# EAGLE board soic16 (EAGLE 5.06)
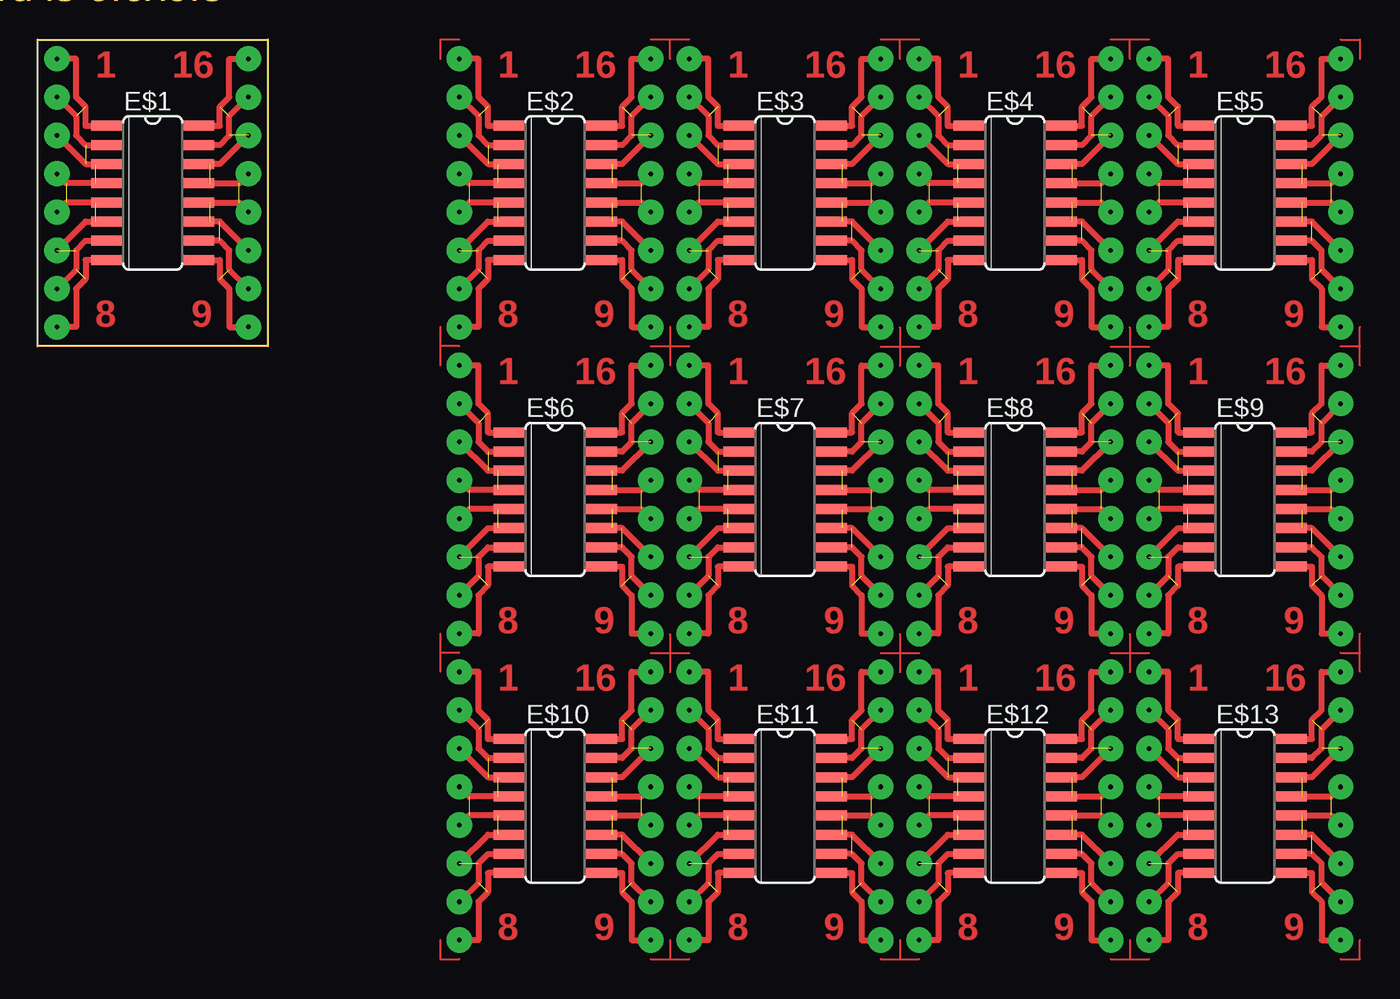
[diagram p0: board, top side]

Size 15.24 x 20.32 mm. Coordinates in mm from the lower left corner, seen from the top.
Outline: 15.24,20.32 15.24,0 0,0 0,20.32 15.24,20.32
Copper layers (1*16): Top 0.035mm / dielectric 1.5mm / Bottom 0.035mm
Design rules "default": minimum track width 10mil, minimum drill 24mil, track to track 8mil, track to pad 8mil, pad to pad 8mil, via to via 8mil, smd to smd 8mil, copper to edge 40mil, drill to drill 8mil, minimum pad ring 10mil, minimum via ring 8mil, stop-mask expansion 4mil, vias tented up to drill 0mil, thermal gap 10mil

## Footprints (pad centres in the part's own frame; a part is rotated, then mirrored left to right if it is on the bottom)
SO16 = smd 0.66 x 2.032: 1 -4.445,-3.073; 2 -3.175,-3.073; 3 -1.905,-3.073; 4 -0.635,-3.073; 5 0.635,-3.073; 6 1.905,-3.073; 7 3.175,-3.073; 8 4.445,-3.073; 9 4.445,3.073; 10 3.175,3.073; 11 1.905,3.073; 12 0.635,3.073; 13 -0.635,3.073; 14 -1.905,3.073; 15 -3.175,3.073; 16 -4.445,3.073

## Placement (x,y rotation side)
E$1  [SO16]  7.62,10.16 270 top
E$2  [SO16]  34.29,10.16 270 top  (outside the outline)
E$3  [SO16]  49.53,10.16 270 top  (outside the outline)
E$4  [SO16]  64.77,10.16 270 top  (outside the outline)
E$5  [SO16]  80.01,10.16 270 top  (outside the outline)
E$6  [SO16]  34.29,-10.16 270 top  (outside the outline)
E$7  [SO16]  49.53,-10.16 270 top  (outside the outline)
E$8  [SO16]  64.77,-10.16 270 top  (outside the outline)
E$9  [SO16]  80.01,-10.16 270 top  (outside the outline)
E$10  [SO16]  34.29,-30.48 270 top  (outside the outline)
E$11  [SO16]  49.53,-30.48 270 top  (outside the outline)
E$12  [SO16]  64.77,-30.48 270 top  (outside the outline)
E$13  [SO16]  80.01,-30.48 270 top  (outside the outline)

## Library data of the parts
E$1-E$13 = 45xx

## Tracks (layer width: path | path; a pad name or v marks a point on that pad's centre or on a via)
S$1  (via drill 0.3 pad 1.68)  (7 unrouted)
  Top 0.406: 38.1,10.79 40,10.79 v40.64,11.43 | 38.1,9.53 40,9.53 v40.64,8.89 | v40.64,13.97 38.73,12.06 38.1,12.06 | v40.64,6.35 38.73,8.26 38.1,8.26 | v40.64,16.51 39.37,15.24 39.37,13.97 38.73,13.34 38.1,13.34 | v40.64,19.05 39.37,19.05 39.37,16.51 38.73,15.88 38.73,14.61 38.1,14.61 | v40.64,3.81 39.37,5.08 39.37,6.35 38.73,6.99 38.1,6.99 | v40.64,1.27 39.37,1.27 39.37,3.81 38.73,4.45 38.73,5.71 38.1,5.71
S$2  (via drill 0.3 pad 1.68)  (7 unrouted)
  Top 0.406: 11.43,10.79 13.34,10.79 v13.97,11.43 | 11.43,9.53 13.34,9.53 v13.97,8.89 | v13.97,13.97 12.07,12.06 11.43,12.06 | v13.97,6.35 12.07,8.26 11.43,8.26 | v13.97,16.51 12.7,15.24 12.7,13.97 12.07,13.34 11.43,13.34 | v13.97,19.05 12.7,19.05 12.7,16.51 12.07,15.88 12.07,14.61 11.43,14.61 | v13.97,3.81 12.7,5.08 12.7,6.35 12.07,6.99 11.43,6.99 | v13.97,1.27 12.7,1.27 12.7,3.81 12.07,4.45 12.07,5.71 11.43,5.71
S$3  (via drill 0.3 pad 1.68)  (7 unrouted)
  Top 0.406: 30.48,8.26 29.85,8.26 v27.94,6.35 | 30.48,9.53 28.57,9.53 v27.94,8.89 | 30.48,12.06 29.85,12.06 v27.94,13.97 | 30.48,10.79 28.57,10.79 v27.94,11.43 | v27.94,16.51 29.21,15.24 29.21,13.97 29.85,13.34 30.48,13.34 | v27.94,19.05 29.21,19.05 29.21,16.51 29.85,15.88 29.85,14.61 30.48,14.61 | v27.94,3.81 29.21,5.08 29.21,6.35 29.85,6.99 30.48,6.99 | v27.94,1.27 29.21,1.27 29.21,3.81 29.85,4.45 29.85,5.71 30.48,5.71
S$4  (via drill 0.3 pad 1.68)  (7 unrouted)
  Top 0.406: 3.81,8.26 3.17,8.26 v1.27,6.35 | 3.81,9.53 1.91,9.53 v1.27,8.89 | 3.81,12.06 3.17,12.06 v1.27,13.97 | 3.81,10.79 1.91,10.79 v1.27,11.43 | v1.27,16.51 2.54,15.24 2.54,13.97 3.17,13.34 3.81,13.34 | v1.27,19.05 2.54,19.05 2.54,16.51 3.17,15.88 3.17,14.61 3.81,14.61 | v1.27,3.81 2.54,5.08 2.54,6.35 3.17,6.99 3.81,6.99 | v1.27,1.27 2.54,1.27 2.54,3.81 3.17,4.45 3.17,5.71 3.81,5.71
S$5  (via drill 0.3 pad 1.68)  (7 unrouted)
  Top 0.406: 53.34,10.79 55.24,10.79 v55.88,11.43 | 53.34,9.53 55.24,9.53 v55.88,8.89 | v55.88,13.97 53.97,12.06 53.34,12.06 | v55.88,6.35 53.97,8.26 53.34,8.26 | v55.88,16.51 54.61,15.24 54.61,13.97 53.97,13.34 53.34,13.34 | v55.88,19.05 54.61,19.05 54.61,16.51 53.97,15.88 53.97,14.61 53.34,14.61 | v55.88,3.81 54.61,5.08 54.61,6.35 53.97,6.99 53.34,6.99 | v55.88,1.27 54.61,1.27 54.61,3.81 53.97,4.45 53.97,5.71 53.34,5.71
S$6  (via drill 0.3 pad 1.68)  (7 unrouted)
  Top 0.406: 45.72,8.26 45.09,8.26 v43.18,6.35 | 45.72,9.53 43.81,9.53 v43.18,8.89 | 45.72,12.06 45.09,12.06 v43.18,13.97 | 45.72,10.79 43.81,10.79 v43.18,11.43 | v43.18,16.51 44.45,15.24 44.45,13.97 45.09,13.34 45.72,13.34 | v43.18,19.05 44.45,19.05 44.45,16.51 45.09,15.88 45.09,14.61 45.72,14.61 | v43.18,3.81 44.45,5.08 44.45,6.35 45.09,6.99 45.72,6.99 | v43.18,1.27 44.45,1.27 44.45,3.81 45.09,4.45 45.09,5.71 45.72,5.71
S$7  (via drill 0.3 pad 1.68)  (7 unrouted)
  Top 0.406: 68.58,10.79 70.48,10.79 v71.12,11.43 | 68.58,9.53 70.48,9.53 v71.12,8.89 | v71.12,13.97 69.22,12.06 68.58,12.06 | v71.12,6.35 69.22,8.26 68.58,8.26 | v71.12,16.51 69.85,15.24 69.85,13.97 69.22,13.34 68.58,13.34 | v71.12,19.05 69.85,19.05 69.85,16.51 69.22,15.88 69.22,14.61 68.58,14.61 | v71.12,3.81 69.85,5.08 69.85,6.35 69.22,6.99 68.58,6.99 | v71.12,1.27 69.85,1.27 69.85,3.81 69.22,4.45 69.22,5.71 68.58,5.71
S$8  (via drill 0.3 pad 1.68)  (7 unrouted)
  Top 0.406: 60.96,8.26 60.32,8.26 v58.42,6.35 | 60.96,9.53 59.05,9.53 v58.42,8.89 | 60.96,12.06 60.32,12.06 v58.42,13.97 | 60.96,10.79 59.05,10.79 v58.42,11.43 | v58.42,16.51 59.69,15.24 59.69,13.97 60.32,13.34 60.96,13.34 | v58.42,19.05 59.69,19.05 59.69,16.51 60.32,15.88 60.32,14.61 60.96,14.61 | v58.42,3.81 59.69,5.08 59.69,6.35 60.32,6.99 60.96,6.99 | v58.42,1.27 59.69,1.27 59.69,3.81 60.32,4.45 60.32,5.71 60.96,5.71
S$9  (via drill 0.3 pad 1.68)  (7 unrouted)
  Top 0.406: 83.82,10.79 85.73,10.79 v86.36,11.43 | 83.82,9.53 85.73,9.53 v86.36,8.89 | v86.36,13.97 84.45,12.06 83.82,12.06 | v86.36,6.35 84.45,8.26 83.82,8.26 | v86.36,16.51 85.09,15.24 85.09,13.97 84.45,13.34 83.82,13.34 | v86.36,19.05 85.09,19.05 85.09,16.51 84.45,15.88 84.45,14.61 83.82,14.61 | v86.36,3.81 85.09,5.08 85.09,6.35 84.45,6.99 83.82,6.99 | v86.36,1.27 85.09,1.27 85.09,3.81 84.45,4.45 84.45,5.71 83.82,5.71
S$10  (via drill 0.3 pad 1.68)  (7 unrouted)
  Top 0.406: 76.2,8.26 75.56,8.26 v73.66,6.35 | 76.2,9.53 74.3,9.53 v73.66,8.89 | 76.2,12.06 75.56,12.06 v73.66,13.97 | 76.2,10.79 74.3,10.79 v73.66,11.43 | v73.66,16.51 74.93,15.24 74.93,13.97 75.56,13.34 76.2,13.34 | v73.66,19.05 74.93,19.05 74.93,16.51 75.56,15.88 75.56,14.61 76.2,14.61 | v73.66,3.81 74.93,5.08 74.93,6.35 75.56,6.99 76.2,6.99 | v73.66,1.27 74.93,1.27 74.93,3.81 75.56,4.45 75.56,5.71 76.2,5.71
S$11  (via drill 0.3 pad 1.68)  (7 unrouted)
  Top 0.406: 38.1,-9.52 40,-9.52 v40.64,-8.89 | 38.1,-10.79 40,-10.79 v40.64,-11.43 | v40.64,-6.35 38.73,-8.25 38.1,-8.25 | v40.64,-13.97 38.73,-12.07 38.1,-12.07 | v40.64,-3.81 39.37,-5.08 39.37,-6.35 38.73,-6.98 38.1,-6.98 | v40.64,-1.27 39.37,-1.27 39.37,-3.81 38.73,-4.45 38.73,-5.71 38.1,-5.71 | v40.64,-16.51 39.37,-15.24 39.37,-13.97 38.73,-13.34 38.1,-13.34 | v40.64,-19.05 39.37,-19.05 39.37,-16.51 38.73,-15.88 38.73,-14.61 38.1,-14.61
S$12  (via drill 0.3 pad 1.68)  (7 unrouted)
  Top 0.406: 30.48,-12.07 29.85,-12.07 v27.94,-13.97 | 30.48,-10.79 28.57,-10.79 v27.94,-11.43 | 30.48,-8.25 29.85,-8.25 v27.94,-6.35 | 30.48,-9.52 28.57,-9.52 v27.94,-8.89 | v27.94,-3.81 29.21,-5.08 29.21,-6.35 29.85,-6.98 30.48,-6.98 | v27.94,-1.27 29.21,-1.27 29.21,-3.81 29.85,-4.45 29.85,-5.71 30.48,-5.71 | v27.94,-16.51 29.21,-15.24 29.21,-13.97 29.85,-13.34 30.48,-13.34 | v27.94,-19.05 29.21,-19.05 29.21,-16.51 29.85,-15.88 29.85,-14.61 30.48,-14.61
S$13  (via drill 0.3 pad 1.68)  (7 unrouted)
  Top 0.406: 53.34,-9.52 55.24,-9.52 v55.88,-8.89 | 53.34,-10.79 55.24,-10.79 v55.88,-11.43 | v55.88,-6.35 53.97,-8.25 53.34,-8.25 | v55.88,-13.97 53.97,-12.07 53.34,-12.07 | v55.88,-3.81 54.61,-5.08 54.61,-6.35 53.97,-6.98 53.34,-6.98 | v55.88,-1.27 54.61,-1.27 54.61,-3.81 53.97,-4.45 53.97,-5.71 53.34,-5.71 | v55.88,-16.51 54.61,-15.24 54.61,-13.97 53.97,-13.34 53.34,-13.34 | v55.88,-19.05 54.61,-19.05 54.61,-16.51 53.97,-15.88 53.97,-14.61 53.34,-14.61
S$14  (via drill 0.3 pad 1.68)  (7 unrouted)
  Top 0.406: 45.72,-12.07 45.09,-12.07 v43.18,-13.97 | 45.72,-10.79 43.81,-10.79 v43.18,-11.43 | 45.72,-8.25 45.09,-8.25 v43.18,-6.35 | 45.72,-9.52 43.81,-9.52 v43.18,-8.89 | v43.18,-3.81 44.45,-5.08 44.45,-6.35 45.09,-6.98 45.72,-6.98 | v43.18,-1.27 44.45,-1.27 44.45,-3.81 45.09,-4.45 45.09,-5.71 45.72,-5.71 | v43.18,-16.51 44.45,-15.24 44.45,-13.97 45.09,-13.34 45.72,-13.34 | v43.18,-19.05 44.45,-19.05 44.45,-16.51 45.09,-15.88 45.09,-14.61 45.72,-14.61
S$15  (via drill 0.3 pad 1.68)  (7 unrouted)
  Top 0.406: 68.58,-9.52 70.48,-9.52 v71.12,-8.89 | 68.58,-10.79 70.48,-10.79 v71.12,-11.43 | v71.12,-6.35 69.22,-8.25 68.58,-8.25 | v71.12,-13.97 69.22,-12.07 68.58,-12.07 | v71.12,-3.81 69.85,-5.08 69.85,-6.35 69.22,-6.98 68.58,-6.98 | v71.12,-1.27 69.85,-1.27 69.85,-3.81 69.22,-4.45 69.22,-5.71 68.58,-5.71 | v71.12,-16.51 69.85,-15.24 69.85,-13.97 69.22,-13.34 68.58,-13.34 | v71.12,-19.05 69.85,-19.05 69.85,-16.51 69.22,-15.88 69.22,-14.61 68.58,-14.61
S$16  (via drill 0.3 pad 1.68)  (7 unrouted)
  Top 0.406: 60.96,-12.07 60.32,-12.07 v58.42,-13.97 | 60.96,-10.79 59.05,-10.79 v58.42,-11.43 | 60.96,-8.25 60.32,-8.25 v58.42,-6.35 | 60.96,-9.52 59.05,-9.52 v58.42,-8.89 | v58.42,-3.81 59.69,-5.08 59.69,-6.35 60.32,-6.98 60.96,-6.98 | v58.42,-1.27 59.69,-1.27 59.69,-3.81 60.32,-4.45 60.32,-5.71 60.96,-5.71 | v58.42,-16.51 59.69,-15.24 59.69,-13.97 60.32,-13.34 60.96,-13.34 | v58.42,-19.05 59.69,-19.05 59.69,-16.51 60.32,-15.88 60.32,-14.61 60.96,-14.61
S$17  (via drill 0.3 pad 1.68)  (7 unrouted)
  Top 0.406: 83.82,-9.52 85.73,-9.52 v86.36,-8.89 | 83.82,-10.79 85.73,-10.79 v86.36,-11.43 | v86.36,-6.35 84.45,-8.25 83.82,-8.25 | v86.36,-13.97 84.45,-12.07 83.82,-12.07 | v86.36,-3.81 85.09,-5.08 85.09,-6.35 84.45,-6.98 83.82,-6.98 | v86.36,-1.27 85.09,-1.27 85.09,-3.81 84.45,-4.45 84.45,-5.71 83.82,-5.71 | v86.36,-16.51 85.09,-15.24 85.09,-13.97 84.45,-13.34 83.82,-13.34 | v86.36,-19.05 85.09,-19.05 85.09,-16.51 84.45,-15.88 84.45,-14.61 83.82,-14.61
S$18  (via drill 0.3 pad 1.68)  (7 unrouted)
  Top 0.406: 76.2,-12.07 75.56,-12.07 v73.66,-13.97 | 76.2,-10.79 74.3,-10.79 v73.66,-11.43 | 76.2,-8.25 75.56,-8.25 v73.66,-6.35 | 76.2,-9.52 74.3,-9.52 v73.66,-8.89 | v73.66,-3.81 74.93,-5.08 74.93,-6.35 75.56,-6.98 76.2,-6.98 | v73.66,-1.27 74.93,-1.27 74.93,-3.81 75.56,-4.45 75.56,-5.71 76.2,-5.71 | v73.66,-16.51 74.93,-15.24 74.93,-13.97 75.56,-13.34 76.2,-13.34 | v73.66,-19.05 74.93,-19.05 74.93,-16.51 75.56,-15.88 75.56,-14.61 76.2,-14.61
S$19  (via drill 0.3 pad 1.68)  (7 unrouted)
  Top 0.406: 38.1,-29.85 40,-29.85 v40.64,-29.21 | 38.1,-31.11 40,-31.11 v40.64,-31.75 | v40.64,-26.67 38.73,-28.57 38.1,-28.57 | v40.64,-34.29 38.73,-32.39 38.1,-32.39 | v40.64,-24.13 39.37,-25.4 39.37,-26.67 38.73,-27.31 38.1,-27.31 | v40.64,-21.59 39.37,-21.59 39.37,-24.13 38.73,-24.76 38.73,-26.04 38.1,-26.04 | v40.64,-36.83 39.37,-35.56 39.37,-34.29 38.73,-33.66 38.1,-33.66 | v40.64,-39.37 39.37,-39.37 39.37,-36.83 38.73,-36.19 38.73,-34.92 38.1,-34.92
S$20  (via drill 0.3 pad 1.68)  (7 unrouted)
  Top 0.406: 30.48,-32.39 29.85,-32.39 v27.94,-34.29 | 30.48,-31.11 28.57,-31.11 v27.94,-31.75 | 30.48,-28.57 29.85,-28.57 v27.94,-26.67 | 30.48,-29.85 28.57,-29.85 v27.94,-29.21 | v27.94,-24.13 29.21,-25.4 29.21,-26.67 29.85,-27.31 30.48,-27.31 | v27.94,-21.59 29.21,-21.59 29.21,-24.13 29.85,-24.76 29.85,-26.04 30.48,-26.04 | v27.94,-36.83 29.21,-35.56 29.21,-34.29 29.85,-33.66 30.48,-33.66 | v27.94,-39.37 29.21,-39.37 29.21,-36.83 29.85,-36.19 29.85,-34.92 30.48,-34.92
S$21  (via drill 0.3 pad 1.68)  (7 unrouted)
  Top 0.406: 53.34,-29.85 55.24,-29.85 v55.88,-29.21 | 53.34,-31.11 55.24,-31.11 v55.88,-31.75 | v55.88,-26.67 53.97,-28.57 53.34,-28.57 | v55.88,-34.29 53.97,-32.39 53.34,-32.39 | v55.88,-24.13 54.61,-25.4 54.61,-26.67 53.97,-27.31 53.34,-27.31 | v55.88,-21.59 54.61,-21.59 54.61,-24.13 53.97,-24.76 53.97,-26.04 53.34,-26.04 | v55.88,-36.83 54.61,-35.56 54.61,-34.29 53.97,-33.66 53.34,-33.66 | v55.88,-39.37 54.61,-39.37 54.61,-36.83 53.97,-36.19 53.97,-34.92 53.34,-34.92
S$22  (via drill 0.3 pad 1.68)  (7 unrouted)
  Top 0.406: 45.72,-32.39 45.09,-32.39 v43.18,-34.29 | 45.72,-31.11 43.81,-31.11 v43.18,-31.75 | 45.72,-28.57 45.09,-28.57 v43.18,-26.67 | 45.72,-29.85 43.81,-29.85 v43.18,-29.21 | v43.18,-24.13 44.45,-25.4 44.45,-26.67 45.09,-27.31 45.72,-27.31 | v43.18,-21.59 44.45,-21.59 44.45,-24.13 45.09,-24.76 45.09,-26.04 45.72,-26.04 | v43.18,-36.83 44.45,-35.56 44.45,-34.29 45.09,-33.66 45.72,-33.66 | v43.18,-39.37 44.45,-39.37 44.45,-36.83 45.09,-36.19 45.09,-34.92 45.72,-34.92
S$23  (via drill 0.3 pad 1.68)  (7 unrouted)
  Top 0.406: 68.58,-29.85 70.48,-29.85 v71.12,-29.21 | 68.58,-31.11 70.48,-31.11 v71.12,-31.75 | v71.12,-26.67 69.22,-28.57 68.58,-28.57 | v71.12,-34.29 69.22,-32.39 68.58,-32.39 | v71.12,-24.13 69.85,-25.4 69.85,-26.67 69.22,-27.31 68.58,-27.31 | v71.12,-21.59 69.85,-21.59 69.85,-24.13 69.22,-24.76 69.22,-26.04 68.58,-26.04 | v71.12,-36.83 69.85,-35.56 69.85,-34.29 69.22,-33.66 68.58,-33.66 | v71.12,-39.37 69.85,-39.37 69.85,-36.83 69.22,-36.19 69.22,-34.92 68.58,-34.92
S$24  (via drill 0.3 pad 1.68)  (7 unrouted)
  Top 0.406: 60.96,-32.39 60.32,-32.39 v58.42,-34.29 | 60.96,-31.11 59.05,-31.11 v58.42,-31.75 | 60.96,-28.57 60.32,-28.57 v58.42,-26.67 | 60.96,-29.85 59.05,-29.85 v58.42,-29.21 | v58.42,-24.13 59.69,-25.4 59.69,-26.67 60.32,-27.31 60.96,-27.31 | v58.42,-21.59 59.69,-21.59 59.69,-24.13 60.32,-24.76 60.32,-26.04 60.96,-26.04 | v58.42,-36.83 59.69,-35.56 59.69,-34.29 60.32,-33.66 60.96,-33.66 | v58.42,-39.37 59.69,-39.37 59.69,-36.83 60.32,-36.19 60.32,-34.92 60.96,-34.92
S$25  (via drill 0.3 pad 1.68)  (7 unrouted)
  Top 0.406: 83.82,-29.85 85.73,-29.85 v86.36,-29.21 | 83.82,-31.11 85.73,-31.11 v86.36,-31.75 | v86.36,-26.67 84.45,-28.57 83.82,-28.57 | v86.36,-34.29 84.45,-32.39 83.82,-32.39 | v86.36,-24.13 85.09,-25.4 85.09,-26.67 84.45,-27.31 83.82,-27.31 | v86.36,-21.59 85.09,-21.59 85.09,-24.13 84.45,-24.76 84.45,-26.04 83.82,-26.04 | v86.36,-36.83 85.09,-35.56 85.09,-34.29 84.45,-33.66 83.82,-33.66 | v86.36,-39.37 85.09,-39.37 85.09,-36.83 84.45,-36.19 84.45,-34.92 83.82,-34.92
S$26  (via drill 0.3 pad 1.68)  (7 unrouted)
  Top 0.406: 76.2,-32.39 75.56,-32.39 v73.66,-34.29 | 76.2,-31.11 74.3,-31.11 v73.66,-31.75 | 76.2,-28.57 75.56,-28.57 v73.66,-26.67 | 76.2,-29.85 74.3,-29.85 v73.66,-29.21 | v73.66,-24.13 74.93,-25.4 74.93,-26.67 75.56,-27.31 76.2,-27.31 | v73.66,-21.59 74.93,-21.59 74.93,-24.13 75.56,-24.76 75.56,-26.04 76.2,-26.04 | v73.66,-36.83 74.93,-35.56 74.93,-34.29 75.56,-33.66 76.2,-33.66 | v73.66,-39.37 74.93,-39.37 74.93,-36.83 75.56,-36.19 75.56,-34.92 76.2,-34.92
S$27
  Top 0.127: 27.94,20.32 26.67,20.32 26.67,19.05
S$28
  Top 0.127: 86.36,20.32 87.63,20.32 87.63,19.05
S$29
  Top 0.127: 87.63,-39.37 87.63,-40.64 86.36,-40.64
S$30
  Top 0.127: 26.67,-39.37 26.67,-40.64 27.94,-40.64
S$31
  Top 0.127: 40.64,-40.64 41.91,-40.64 | 41.91,-40.64 43.18,-40.64 | 41.91,-39.37 41.91,-40.64
S$32
  Top 0.127: 55.88,-40.64 57.15,-40.64 | 57.15,-40.64 58.42,-40.64 | 57.15,-39.37 57.15,-40.64
S$33
  Top 0.127: 71.12,-40.64 72.39,-40.64 | 72.39,-40.64 73.66,-40.64 | 72.39,-39.37 72.39,-40.64
S$34
  Top 0.127: 87.63,-21.59 87.63,-20.32 | 87.63,-20.32 87.63,-19.05 | 86.36,-20.32 87.63,-20.32
S$35
  Top 0.127: 26.67,-19.05 26.67,-20.32 | 26.67,-20.32 26.67,-21.59 | 27.94,-20.32 26.67,-20.32
S$36
  Top 0.127: 26.67,1.27 26.67,0 | 26.67,0 26.67,-1.27 | 27.94,0 26.67,0
S$37
  Top 0.127: 87.63,-1.27 87.63,0 | 87.63,0 87.63,1.27 | 86.36,0 87.63,0
S$38
  Top 0.127: 73.66,20.32 72.39,20.32 | 72.39,20.32 71.12,20.32 | 72.39,19.05 72.39,20.32
S$39
  Top 0.127: 43.18,20.32 41.91,20.32 | 41.91,20.32 40.64,20.32 | 41.91,19.05 41.91,20.32
S$40
  Top 0.127: 58.42,20.32 57.15,20.32 | 57.15,20.32 55.88,20.32 | 57.15,19.05 57.15,20.32
S$41
  Top 0.127: 41.91,1.27 41.91,-1.27
S$42
  Top 0.127: 40.64,0 43.18,0
S$43
  Top 0.127: 57.14,1.24 57.14,-1.3
S$44
  Top 0.127: 55.87,-0.03 58.41,-0.03
S$45
  Top 0.127: 72.38,1.24 72.38,-1.3
S$46
  Top 0.127: 71.11,-0.03 73.65,-0.03
S$47
  Top 0.127: 41.9,-19.08 41.9,-21.62
S$48
  Top 0.127: 40.63,-20.35 43.17,-20.35
S$49
  Top 0.127: 57.14,-19.08 57.14,-21.62
S$50
  Top 0.127: 55.87,-20.35 58.41,-20.35
S$51
  Top 0.127: 72.38,-19.08 72.38,-21.62
S$52
  Top 0.127: 71.11,-20.35 73.65,-20.35

## Text on the board
Top: 1 | 16 | 1 | 16 | 1 | 16 | 1 | 16 | 1 | 16 | 8 | 9 | 8 | 9 | 8 | 9 | 8 | 9 | 8 | 9 | 1 | 16 | 1 | 16 | 1 | 16 | 1 | 16 | 8 | 9 | 8 | 9 | 8 | 9 | 8 | 9 | 1 | 16 | 1 | 16 | 1 | 16 | 1 | 16 | 8 | 9 | 8 | 9 | 8 | 9 | 8 | 9
Dimension: Board is 0.6x0.8